# Altium PCB Power_LED.PcbDoc
Units mil, origin at the board's own origin, x right, y up, seen from the top; angles counter-clockwise.
Board outline 3862.2 x 1625.98 mil, 2 copper layers (Top Layer, Bottom Layer); 50 components, 13 nets, 143 pads, 33 vias.
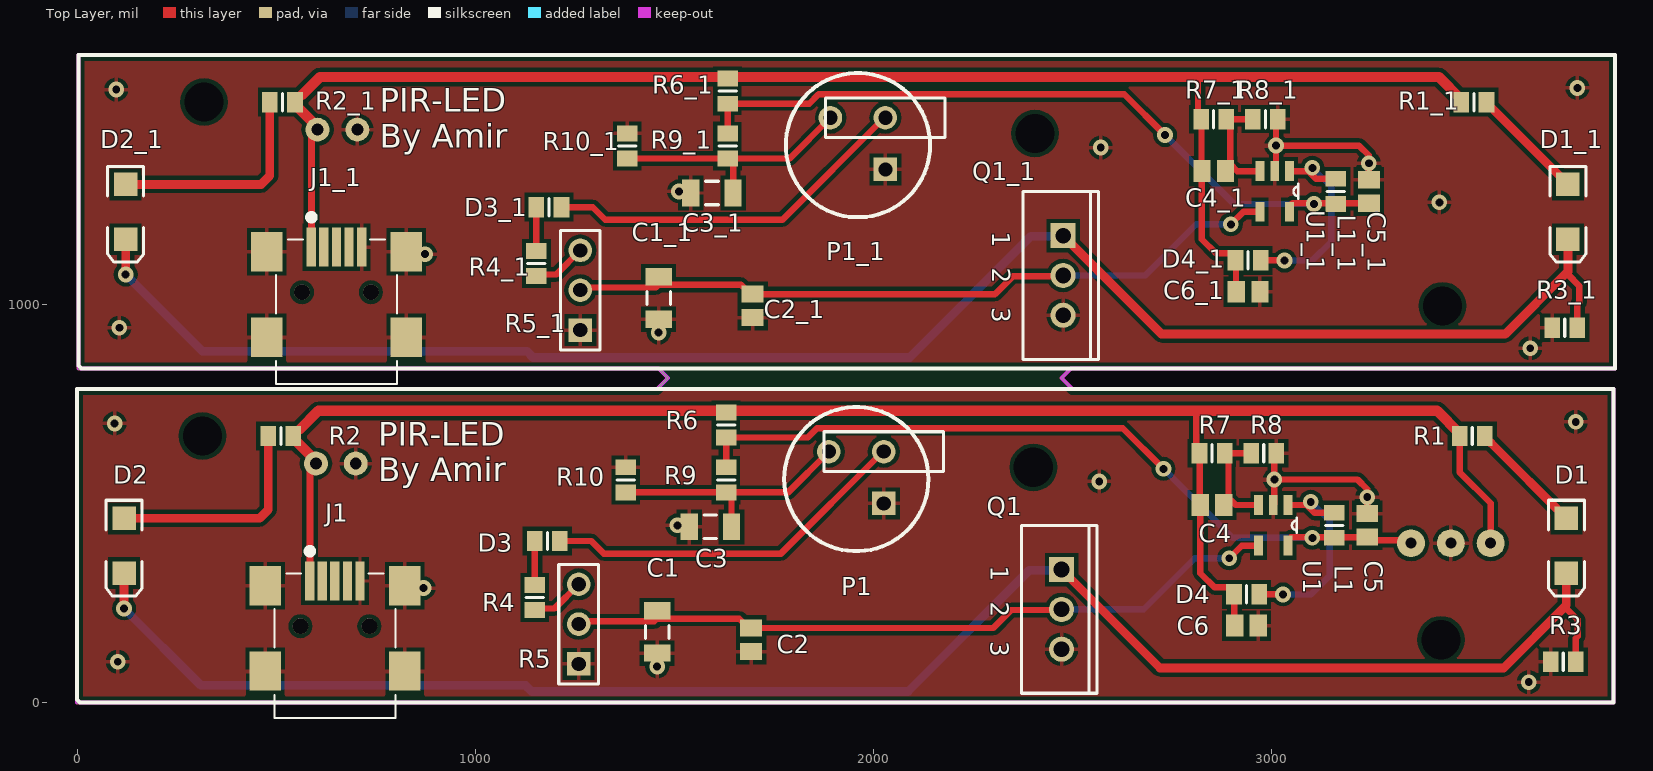
[diagram p0: Top Layer view]
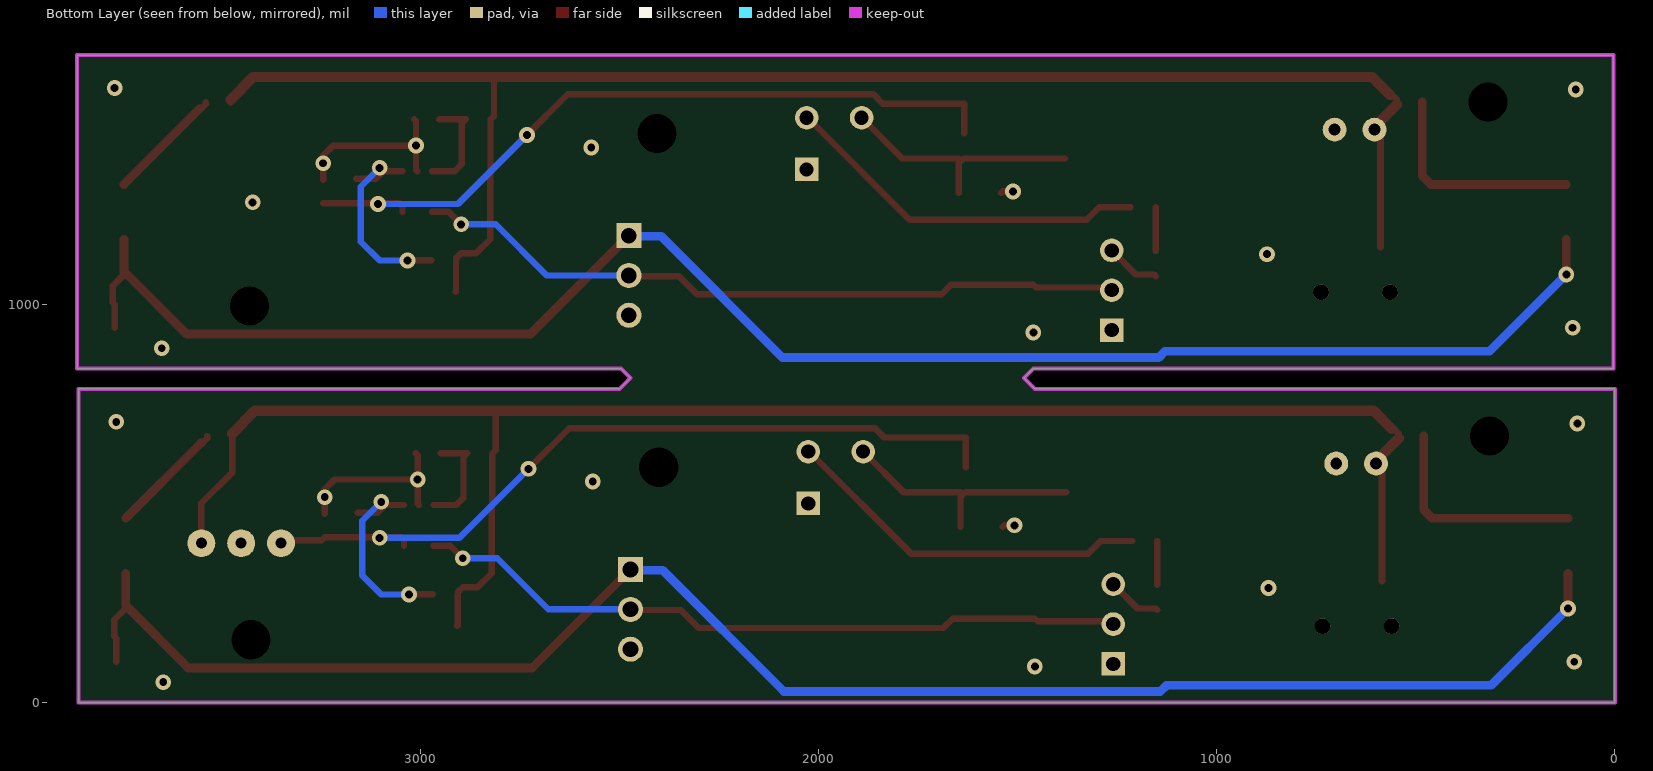
[diagram p1: Bottom Layer view, seen from below]

## Layer stack, top to bottom
Top Solder: solder mask 0.4, Solder Resist, Dk 3.5
Top Layer: signal copper 1.4
Dielectric 1: dielectric 12.6, FR-4, Dk 4.8
Bottom Layer: signal copper 1.4
Bottom Solder: solder mask 0.4, Solder Resist, Dk 3.5

## Board outline
0,0 0,787.4 1456.69,787.4 1484.25,814.96 1460.63,838.58 3.94,838.58 3.94,1625.98 3862.2,1625.98 3862.2,838.58 2496.06,838.58 2472.44,814.96 2500,787.4 3858.27,787.4 3858.27,0

## Design rules (kind name [scope] priority, off if disabled: settings)
Clearance [All] p1: gap=10 ignorepadtopadclearanceinfootprint=FALSE except(0: Arc-Hole Track-Hole SMDPad-Hole THPad-Hole Via-Hole Fill-Hole Poly-Hole Region-Hole Text-Hole)
PolygonConnect [All] p1: connectstyle=Relief reliefconductorwidth=10 reliefentries=4 polygonreliefangle="90 Angle" airgapwidth=10
RoutingVias [All] p1: holewidth=28 width=50 viastyle="Through Hole" minholewidth=28 minwidth=50 maxholewidth=28 maxwidth=50
SolderMaskExpansion [All] p1: expansion=4 istentingtop=FALSE
Width [All] p1: maxlimit=28 minlimit=14 preferedwidth=16
30 further rules are at their usual default settings.

## Classes and differential pairs
component class Power_LED_1: C1 C2 C3 C4 C5 C6 D1 D2 D3 D4 J1 L1 P1 Q1 R1 R2 R3 R4 R5 R6 R7 R8 R9 R10 U1

## Components (designator, comment, footprint, x,y, rotation, side; value= is the part's Value field where it differs from the comment)
C1 "" C1206 1456.69,177.17 r90 top value=10uF
C1_1 "" C1206 1460.63,1015.75 r90 top value=10uF (schematic designator C1)
C2 "" C0805 1692.91,157.48 r90 top value=10uF
C2_1 "" C0805 1696.85,996.06 r90 top value=10uF (schematic designator C2)
C3 "" C1206 1590.55,440.94 r0 top value=10uF
C3_1 "" C1206 1594.49,1279.53 r0 top value=10uF (schematic designator C3)
C4 "" C0805 2850.39,496.06 r180 top value=10uF
C4_1 "" C0805 2854.33,1334.65 r180 top value=10uF (schematic designator C4)
C5 "" C0805 3240.16,444.88 r270 top value=10uF
C5_1 "" C0805 3244.09,1283.46 r270 top value=10uF (schematic designator C5)
C6 "" C0805 2937.01,192.91 r180 top value=10uF
C6_1 "" C0805 2940.94,1031.5 r180 top value=10uF (schematic designator C6)
D1 "LED2" 3.2X1.6X1.1 3740.16,393.7 r270 top
D1_1 "LED2" 3.2X1.6X1.1 3744.09,1232.28 r270 top (schematic designator D1)
D2 "LED2" 3.2X1.6X1.1 118.11,393.7 r270 top
D2_1 "LED2" 3.2X1.6X1.1 122.05,1232.28 r270 top (schematic designator D2)
D3 "" 6-0805_L 1181.1,405.51 r180 top
D3_1 "" 6-0805_L 1185.04,1244.09 r180 top (schematic designator D3)
D4 "" 6-0805_L 2937.01,271.65 r180 top
D4_1 "" 6-0805_L 2940.94,1110.24 r180 top (schematic designator D4)
J1 "MUSB-05-S-B-SM-A" *SAMTEC_MUSB-05-S-B-SM-A 647.64,305.12 r0 top
J1_1 "MUSB-05-S-B-SM-A" *SAMTEC_MUSB-05-S-B-SM-A 651.57,1143.7 r0 top (schematic designator J1)
L1 "" 6-0805_L 3157.48,444.88 r270 top value=10mH
L1_1 "" 6-0805_L 3161.42,1283.46 r270 top value=10mH (schematic designator L1)
P1 "PIR" HDR1X3#1 2125.98,629.92 r180 top
P1_1 "PIR" HDR1X3#1 2129.92,1468.5 r180 top (schematic designator P1)
Q1 "MOSFET-N" TO-220-AB 2472.44,233.86 r270 top
Q1_1 "MOSFET-N" TO-220-AB 2476.38,1072.44 r270 top (schematic designator Q1)
R1 "" 6-0805_L 3503.94,669.29 r0 top value=100R
R1_1 "" 6-0805_L 3507.87,1507.87 r0 top value=100R (schematic designator R1)
R2 "" 6-0805_L 511.81,669.29 r180 top value=100R
R2_1 "" 6-0805_L 515.75,1507.87 r180 top value=100R (schematic designator R2)
R3 "" 6-0805_L 3732.28,102.36 r0 top value=1K
R3_1 "" 6-0805_L 3736.22,940.94 r0 top value=1K (schematic designator R3)
R4 "" 6-0805_L 1149.61,263.78 r90 top value=100K
R4_1 "" 6-0805_L 1153.54,1102.36 r90 top value=100K (schematic designator R4)
R5 "Var Res" HDR1X3#2 1259.84,96.85 r90 top
R5_1 "Var Res" HDR1X3#2 1263.78,935.43 r90 top (schematic designator R5)
R6 "" 6-0805_L 1629.92,696.85 r90 top value=1K
R6_1 "" 6-0805_L 1633.86,1535.43 r90 top value=1K (schematic designator R6)
R7 "" 6-0805_L 2850.39,625.98 r180 top value=100R
R7_1 "" 6-0805_L 2854.33,1464.57 r180 top value=100R (schematic designator R7)
R8 "" 6-0805_L 2980.31,625.98 r180 top value=100R
R8_1 "" 6-0805_L 2984.25,1464.57 r180 top value=100R (schematic designator R8)
R9 "" 6-0805_L 1629.92,559.06 r90 top value=100R
R9_1 "" 6-0805_L 1633.86,1397.64 r90 top value=100R (schematic designator R9)
R10 "" 6-0805_L 1377.95,559.06 r270 top value=2.2K
R10_1 "" 6-0805_L 1381.89,1397.64 r270 top value=2.2K (schematic designator R10)
U1 "LT1615ES5-1PBF" SOT95P280X145-5N 3003.94,444.88 r270 top
U1_1 "LT1615ES5-1PBF" SOT95P280X145-5N 3007.87,1283.46 r270 top (schematic designator U1)

## Footprints (in the part's own frame and the unit in brackets; to place one, negate y for a bottom-side part, rotate by r counter-clockwise, add the part's x,y. Pads: shape width x height; smd on the part's side, far side on the other; paste and mask are expansions set on the pad)
3.2X1.6X1.1 [mm] "SMT LED; 2 Flat Leads"
  rect 1.5x1.5 smd: 1(-1.75,0) 2(1.75,0)
  silkscreen extent -2.9,-1.15 3.2,1.15
6-0805_L [mm] "Chip Resistor, Body 2.0x1.2mm, IPC High Density"
  rect 1x1.3 smd: 1(-0.8,0) 2(0.8,0)
  silkscreen extent 0,-0.55 0,0.55, body extent -1.07,-0.7 1.07,0.7, height 0.7
*SAMTEC_MUSB-05-S-B-SM-A [mm]
  round 1 hole 1: 0(-2.2,-2.88) 0(2.2,-2.88)
  rect 0.6x2.5 smd: 1(-1.6,0) 2(-0.8,0) 3(0,0) 4(0.8,0) 5(1.6,0)
  rect 2x2.5 smd: 6(-4.45,-0.3) 7(4.45,-0.3) 8(-4.45,-5.75) 9(4.45,-5.75)
  silkscreen extent -3.85,-8.73 3.85,2.1
C0805 [mm] "Chip Capacitor, Body 2.0x1.3mm, IPC High Density"
  rect 1.1x1.4 smd: 1(-0.75,0) 2(0.75,0)
  body extent -1.1,-0.72 1.1,0.72, height 1.4
C1206 [mm] "Chip Capacitor, Body 3.2x1.6mm, IPC High Density"
  rect 1.1x1.7 smd: 1(-1.35,0) 2(1.35,0)
  silkscreen extent -0.4,-0.75 0.4,0.75, body extent -1.7,-0.9 1.7,0.9, height 1.3
HDR1X3#1 [mm] "Connector; Header; 3 Position"
  rect 1.5x1.5 hole 0.9: 1(2.54,3.3)
  round 1.5 hole 0.9: 2(2.54,0) 3(6.045,0)
  silkscreen extent -1.27,-1.27 6.35,1.27
HDR1X3#2 [mm] "Connector; Header; 3 Position"
  rect 1.5x1.5 hole 0.9: 1(0,0)
  round 1.5 hole 0.9: 2(2.54,0) 3(5.08,0)
  silkscreen extent -1.27,-1.27 6.35,1.27
SOT95P280X145-5N [mil]
  rect 50x22 smd: 1(-51,37) 2(-51,0) 3(-51,-37) 4(51,-37) 5(51,37)
  silkscreen extent -19,47 19,59
TO-220-AB [mm] "TO, Thru-Hole, Vertical, Heatsink Mounted; 3 In-Line Leads; Pitch 2.54 mm"
  rect 1.6x1.6 hole 1: 1(-2.54,0)
  round 1.6 hole 1: 2(0,0) 3(2.54,0)
  silkscreen extent -5.35,-2.55 5.35,2.25

## Part data
C1 C1_1 C2 C2_1 C3 C3_1 C4 C4_1 C5 C5_1 C6 C6_1: library part "Cap Semi", "Capacitor (Semiconductor SIM Model)", LatestRevisionDate=29-May-2009, LatestRevisionNote="IPC-7351 Footprint Added.", PackageDescription="Chip Capacitor", PackageReference=C1206, Published=8-Jun-2000, Publisher="Altium Limited"
D1 D1_1 D2 D2_1: "Typical RED, GREEN, YELLOW, AMBER GaAs LED", LatestRevisionDate=17-Jul-2002, LatestRevisionNote="Re-released for DXP Platform.", PackageDescription="SM LED; 2 Flat Leads", PackageReference=3.2X1.6X1.1, PackageVersion=Feb-2002, Published=8-Jun-2000, Publisher="Altium Limited"
D3 D3_1 D4 D4_1: library part "Diode 1N4001", "1 Amp General Purpose Rectifier", Code_JEDEC=DO-204-AL, ComponentLink1Description="Manufacturer Link", ComponentLink1URL=http://www.fairchildsemi.com/, ComponentLink2Description=Datasheet, ComponentLink2URL=http://www.fairchildsemi.com/ds/1N%2F1N4001.pdf, DatasheetVersion=1998, LatestRevisionDate=17-Jul-2002, LatestRevisionNote="Re-released for DXP Platform.", PackageDescription="Diode, Axial; Body 5.2 x 2.7 mm (LxDia. max), Lead Dia. 0.86 mm (max)", PackageReference=DO-41, PackageVersion=Aug-1999, Published=8-Jun-2000, Publisher="Altium Limited"
J1 J1_1: "Usb Interface 5-Contacts Surfacemount For Mini Usb Gold Mating Tin On Tails", Package=None, Digi-Key_Part_Number=SAM8841-ND, Digi-Key_Purchase_URL=https://www.digikey.com/product-detail/en/samtec-inc/MUSB-05-S-B-SM-A/SAM8841-ND/2664354?utm_source=snapeda&utm_medium=aggregator&utm_campaign=symbol, MF=Samtec, MP=MUSB-05-S-B-SM-A, SnapEDA_Link=https://www.snapeda.com/parts/MUSB-05-S-B-SM-A/Samtec%20Inc./view-part/?ref=snap
L1 L1_1: library part Inductor, "Inductor", Code_IEC=1005, Code_JEITA=0402, LatestRevisionDate=29-May-2009, LatestRevisionNote="IPC-7351 Footprint Added.", PackageDescription="Chip Inductor", PackageReference=0402-A, Published=8-Jun-2000, Publisher="Altium Limited"
P1 P1_1 R5 R5_1: library part "Header 3", "Header, 3-Pin", LatestRevisionDate=17-Jul-2002, LatestRevisionNote="Re-released for DXP Platform.", Publisher="Altium Limited"
Q1 Q1_1: "N-Channel MOSFET", LatestRevisionDate=17-Jul-2002, LatestRevisionNote="Re-released for DXP Platform.", PackageDescription="TO, Flat Index; 3 In-Line, Axial Leads; Body Dia. 4.6mm; Lead Dia. 0.5 mm (max)", PackageReference=E3, PackageVersion=1995/1996, Published=8-Jun-2000, Publisher="Altium Limited"
R1 R1_1 R2 R2_1 R3 R3_1 R4 R4_1 R6 R6_1 R7 R7_1 R8 R8_1 R9 R9_1 R10 R10_1: library part Res3, "Resistor", LatestRevisionDate=29-May-2009, LatestRevisionNote="IPC-7351 Footprint Added.", PackageDescription="Chip Resistor", PackageReference=J1-0603, Published=8-Jun-2000, Publisher="Altium Limited"
U1 U1_1: "Micropower Step-Up DC/DC Converters", Package=None, Availability=Unavailable, MF="{'manufacturer': u'Analog Devices, Inc.'}", MP=LT1615ES5-1PBF, Price=None

## Free pads (board coordinates)
  round 0 hole 98.43: 2(314.96,669.29) 2(318.9,1507.87) 2(2401.57,590.55) 2(2405.51,1429.13) 2(3425.2,157.48) 2(3429.13,996.06)
  round 60 hole 30: 3(700,600) 3(703.94,1438.58) 4(600,600) 4(603.94,1438.58)
  round 70 hole 27.56: 5(3350,400) 5(3450,400) 5(3550,400)

## Via types
v1: diameter 39.37, hole 19.68, Top Layer to Bottom Layer, tented both sides, 25 vias
v2: diameter 39.37, hole 19.68, Top Layer to Bottom Layer, 8 vias

## Nets (pads, with @x,y where several pads share a name; then routed paths per layer and width w, separated by ;. In a path a pad name is that pad's centre, name@x,y a point inside that pad or via, vN(x,y) a via of type N, cw(c..) or ccw(c..) an arc to the next point about the centre after c; other vN are vias at no path point)
BAT: C5.2 L1.2 pad.5@3350,400 R6.1 R9.2 U1.5 | length 2003.7
  Top Layer w16: R9.2 R6.1 1834.65,665.35 1858.27,688.98 2625.98,688.98 v1(2728.35,586.61) ; U1.5 3040.94,407.88 3048.41,415.35 C5.2 3247.83,407.68 3342.32,407.68 pad.5@3350,400
  Bottom Layer w16: v1(2728.35,586.61) 2901.57,413.39 v1(3102.36,413.39)
GND: C1.1 C2.1 C3.1 C5.1 C6.1 J1.5 J1.6 J1.7 J1.8 J1.9 P1.1 pad.3@700,600 pad.5@3450,400 Q1.3 R3.1 R5.1 R8.1 R10.1 U1.2 | length 468.9
  Top Layer w16: v2(1507.87,444.88) 1533.46,444.88 C3.1 ; U1.2 3006.94,498.88 v1(3006.94,560) ; R8.1 3006.94,621.11 v1(3006.94,560) ; C5.1 3240.16,535.43 3215.59,560 v1(3006.94,560)
  other v1: 3645.67,51.18 102.36,102.36 3240.16,515.75 2566.93,555.12 94.49,700.79 3763.78,704.72
  other v2: 1456.69,90.55 870.08,287.4
NetC3_2: C3.2 P1.3 R9.1 R10.2 | length 630.1
  Top Layer w16: R10.2 R9.1 ; C3.2 1643.7,515.87 1637.86,521.72 1643.7,527.56 1785.62,527.56 P1.3
NetC4_1: C4.1 R7.1 R8.2 U1.3 | length 265.8
  Top Layer w16: R8.2 R7.1 2891.73,616.14 2891.73,513.78 2909.63,495.88 U1.3
NetD1_1: D1.1 R1.2 | length 293.8
  Top Layer w16: R1.2 3535.43,663.39 3547.12,651.7 R1.2@3551.06,651.7
  Top Layer w22: R1.2@3551.06,651.7 D1.1
NetD1_2: D1.2 D2.2 Q1.1 R3.2 | length 4408.2
  Top Layer w16: D1.2 3740.16,236.22 3768.96,207.41 3768.96,166.28 3763.78,161.09 R3.2
  Top Layer w22: v2(118.11,236.22) D2.2 ; Q1.1 2719.69,86.61 3582.68,86.61 3740.16,244.09 D1.2
  Bottom Layer w22: v2(118.11,236.22) 311.02,43.31 1125.98,43.31 1141.73,27.56 2086.61,27.56 2391.34,332.28 Q1.1@2472.44,332.28
NetD2_1: D2.1 R2.2 | length 556.2
  Top Layer w22: D2.1 458.66,462.6 480.31,484.25 R2.2
NetD3_1: D3.1 P1.2 | length 932.4
  Top Layer w16: D3.1 1291.34,405.51 1322.83,374.02 1767.72,374.02 2023.62,629.92 P1.2
NetD3_2: D3.2 R4.2 | length 110.2
  Top Layer w16: R4.2 D3.2
NetD4_1: D4.1 L1.1 U1.1 | length 521.2
  Top Layer w16: D4.1 v1@3023.62,271.65 ; U1.1 3088,495.88 3107.51,476.38 L1.1
  Bottom Layer w16: v1(3028.56,271.32) 3098.1,271.32 3145.67,318.9 3145.67,456.69 v1(3098.43,503.94)
NetR4_1: R4.1 R5.3 | length 137
  Top Layer w16: R4.1 1153.53,236.2 1199.2,236.2 R5.3
PIR_EN: C1.2 C2.2 Q1.2 R5.2 U1.4 | length 1807.6
  Top Layer w16: R5.2 1266.73,203.74 1449.8,203.74 1456.69,210.63 1663.39,210.63 1687.01,187.01 C2.2 2301.18,187.01 2346.46,232.28 Q1.2@2472.44,232.28 ; v1(2893.7,362.2) 2925.38,393.88 U1.4
  Bottom Layer w16: Q1.2 2678.74,233.86 2807.09,362.2 v1(2893.7,362.2)
VCC: C4.2 C6.2 D4.2 J1.1 pad.4@600,600 pad.5@3550,400 R1.1 R2.1 R6.2 R7.2 | length 4272.2
  Top Layer w16: R2.1@543.31,663.39 R2.1 543.31,675.2 554.99,686.88 R2.1@560.9,686.88 ; 2811.02,732.28 2811.02,633.86 R7.2 2819.88,625 2819.88,497.05 C4.2 2820.87,324.8 2856.43,289.24 2893.83,289.24 2905.51,277.56 D4.2 2906.5,270.67 2906.5,193.9 C6.2 ; R1.1@3472.44,675.2 R1.1 3472.44,577.56 3550,500 pad.5@3550,400
  Top Layer w18: J1.1 pad.4@584.65,622.05
  Top Layer w26: R2.1@543.31,663.39 pad.4@584.65,622.05 ; R2.1@560.9,686.88 606.3,732.28 2811.02,732.28 3415.35,732.28 R1.1@3472.44,675.2
pads on no net: C1_1.1 C1_1.2 C2_1.1 C2_1.2 C3_1.1 C3_1.2 C4_1.1 C4_1.2 C5_1.1 C5_1.2 C6_1.1 C6_1.2 D1_1.1 D1_1.2 D2_1.1 D2_1.2 D3_1.1 D3_1.2 D4_1.1 D4_1.2 J1.0 J1.2 J1.3 J1.4 J1_1.0 J1_1.1 J1_1.2 J1_1.3 J1_1.4 J1_1.5 J1_1.6 J1_1.7 J1_1.8 J1_1.9 L1_1.1 L1_1.2 P1_1.1 P1_1.2 P1_1.3 Q1_1.1 Q1_1.2 Q1_1.3 R1_1.1 R1_1.2 R2_1.1 R2_1.2 R3_1.1 R3_1.2 R4_1.1 R4_1.2 R5_1.1 R5_1.2 R5_1.3 R6_1.1 R6_1.2 R7_1.1 R7_1.2 R8_1.1 R8_1.2 R9_1.1 R9_1.2 R10_1.1 R10_1.2 U1_1.1 U1_1.2 U1_1.3 U1_1.4 U1_1.5
copper on no net: | length 15989.7
  Top Layer w16: 547.24,1501.97 547.24,1507.87 547.24,1513.78 558.93,1525.46 564.83,1525.46 ; 1153.54,1070.87 1157.46,1074.79 1203.13,1074.79 1263.78,1135.43 ; 1153.54,1133.86 1153.54,1244.09 ; 1216.54,1244.09 1295.28,1244.09 1326.77,1212.6 1771.65,1212.6 2027.56,1468.5 2029.92,1468.5 ; 1263.78,1035.43 1270.67,1042.32 1453.74,1042.32 1460.63,1049.21 1667.32,1049.21 1690.94,1025.59 1696.85,1025.59 2305.12,1025.59 2350.39,1070.87 2476.38,1070.87 ; 1381.89,1366.14 1633.86,1366.14 ; v2(1511.81,1283.46) 1537.4,1283.46 1541.34,1279.53 ; 1633.86,1429.13 1633.86,1503.94 1838.58,1503.94 1862.2,1527.56 2629.92,1527.56 v1(2732.28,1425.2) ; 1647.64,1279.53 1647.64,1354.46 1641.8,1360.3 1647.64,1366.14 1789.56,1366.14 1891.92,1468.5 ; 2814.96,1570.87 2814.96,1472.44 2822.83,1464.57 2823.82,1463.58 2823.82,1335.63 2824.8,1334.65 2824.8,1163.39 2860.36,1127.83 2897.76,1127.83 2909.45,1116.14 2909.45,1110.24 2910.43,1109.25 2910.43,1032.48 2911.42,1031.5 ; v1(2897.64,1200.79) 2929.31,1232.46 2970.87,1232.46 ; 2952.76,1464.57 2885.83,1464.57 2895.67,1454.72 2895.67,1352.36 2913.57,1334.46 2970.87,1334.46 ; 2972.44,1110.24 v1@3027.56,1110.24 ; 3007.87,1334.46 3010.87,1337.46 v1(3010.87,1398.58) ; 3015.75,1464.57 3010.87,1459.69 v1(3010.87,1398.58) ; 3044.87,1232.46 3044.87,1246.46 3052.35,1253.94 3244.09,1253.94 ; 3044.87,1334.46 3091.94,1334.46 3111.44,1314.96 3161.42,1314.96 ; 3244.09,1312.99 3244.09,1374.02 3219.53,1398.58 v1(3010.87,1398.58) ; 3476.38,1507.87 3476.38,1513.78 ; 3539.37,1507.87 3539.37,1501.97 3551.06,1490.28 3554.99,1490.28 ; 3744.09,1163.39 3744.09,1074.8 3772.9,1046 3772.9,1004.86 3767.72,999.67 3767.72,940.94
  Top Layer w18: 588.58,1143.7 588.58,1438.58 588.58,1460.63
  Top Layer w22: v2(122.05,1074.8) 122.05,1163.39 ; 122.05,1301.18 462.6,1301.18 484.25,1322.83 484.25,1507.87 ; 2476.38,1172.44 2723.62,925.2 3586.61,925.2 3744.09,1082.68 3744.09,1163.39 ; 3554.99,1490.28 3744.09,1301.18
  Top Layer w26: 547.24,1501.97 588.58,1460.63 ; 564.83,1525.46 610.24,1570.87 1633.86,1570.87 2814.96,1570.87 3419.29,1570.87 3476.38,1513.78
  Bottom Layer w16: 2476.38,1072.44 2682.68,1072.44 2811.02,1200.79 v1(2897.64,1200.79) ; v1(2732.28,1425.2) 2905.51,1251.97 v1(3106.3,1251.97) ; v1(3032.5,1109.91) 3102.03,1109.91 3149.61,1157.48 3149.61,1295.28 v1(3102.36,1342.52)
  Bottom Layer w22: v2(122.05,1074.8) 314.96,881.89 1129.92,881.89 1145.67,866.14 2090.55,866.14 2395.28,1170.87 2476.38,1170.87
  other v1: 3649.61,889.76 106.3,940.94 3421.26,1255.91 3244.09,1354.33 2570.87,1393.7 98.43,1539.37 3767.72,1543.31
  other v2: 1460.63,929.13 874.02,1125.98

## Polygon pours and split planes (outlines as drawn)
GND on Top Layer "GND_L01_P000" (solid, pour order 0): 3858.27,787.4 3858.27,0 0,0 0,787.4
no net on Top Layer "NONET_L01_P001" (solid, pour order 1): 3862.2,1625.98 3862.2,838.58 3.94,838.58 3.94,1625.98

## Keep-outs
Keep-Out Layer:
  the board outline again, w10

## Silkscreen, mask and mechanical layers (free items; w line width, h text height)
Top Overlay:
  circle w10: c1961.02,1399.61 r181.1
  circle w10: c1957.09,561.02 r181.1
  lines w10: 0,7.87 7.87,0 3858.27,0 3858.27,787.4 0,787.4 0,7.87 ; 3.94,846.46 3.94,1625.98 3862.2,1625.98 3862.2,838.58 11.81,838.58 3.94,846.46
  text "PIR-LED / By Amir" at 759.84,1393.7 h60
  text "PIR-LED / By Amir" at 755.91,555.12 h60

## Text inside footprints (layer, text, board x,y; h text height)
Q1: Top Overlay "3" at 2294.29,153.54 h45 r270; Top Overlay "2" at 2294.29,253.54 h45 r270; Top Overlay "1" at 2294.29,343.7 h45 r270
Q1_1: Top Overlay "3" at 2298.23,992.13 h45 r270; Top Overlay "2" at 2298.23,1092.13 h45 r270; Top Overlay "1" at 2298.23,1182.28 h45 r270